# EAGLE board cansat (EAGLE 9.6.2)
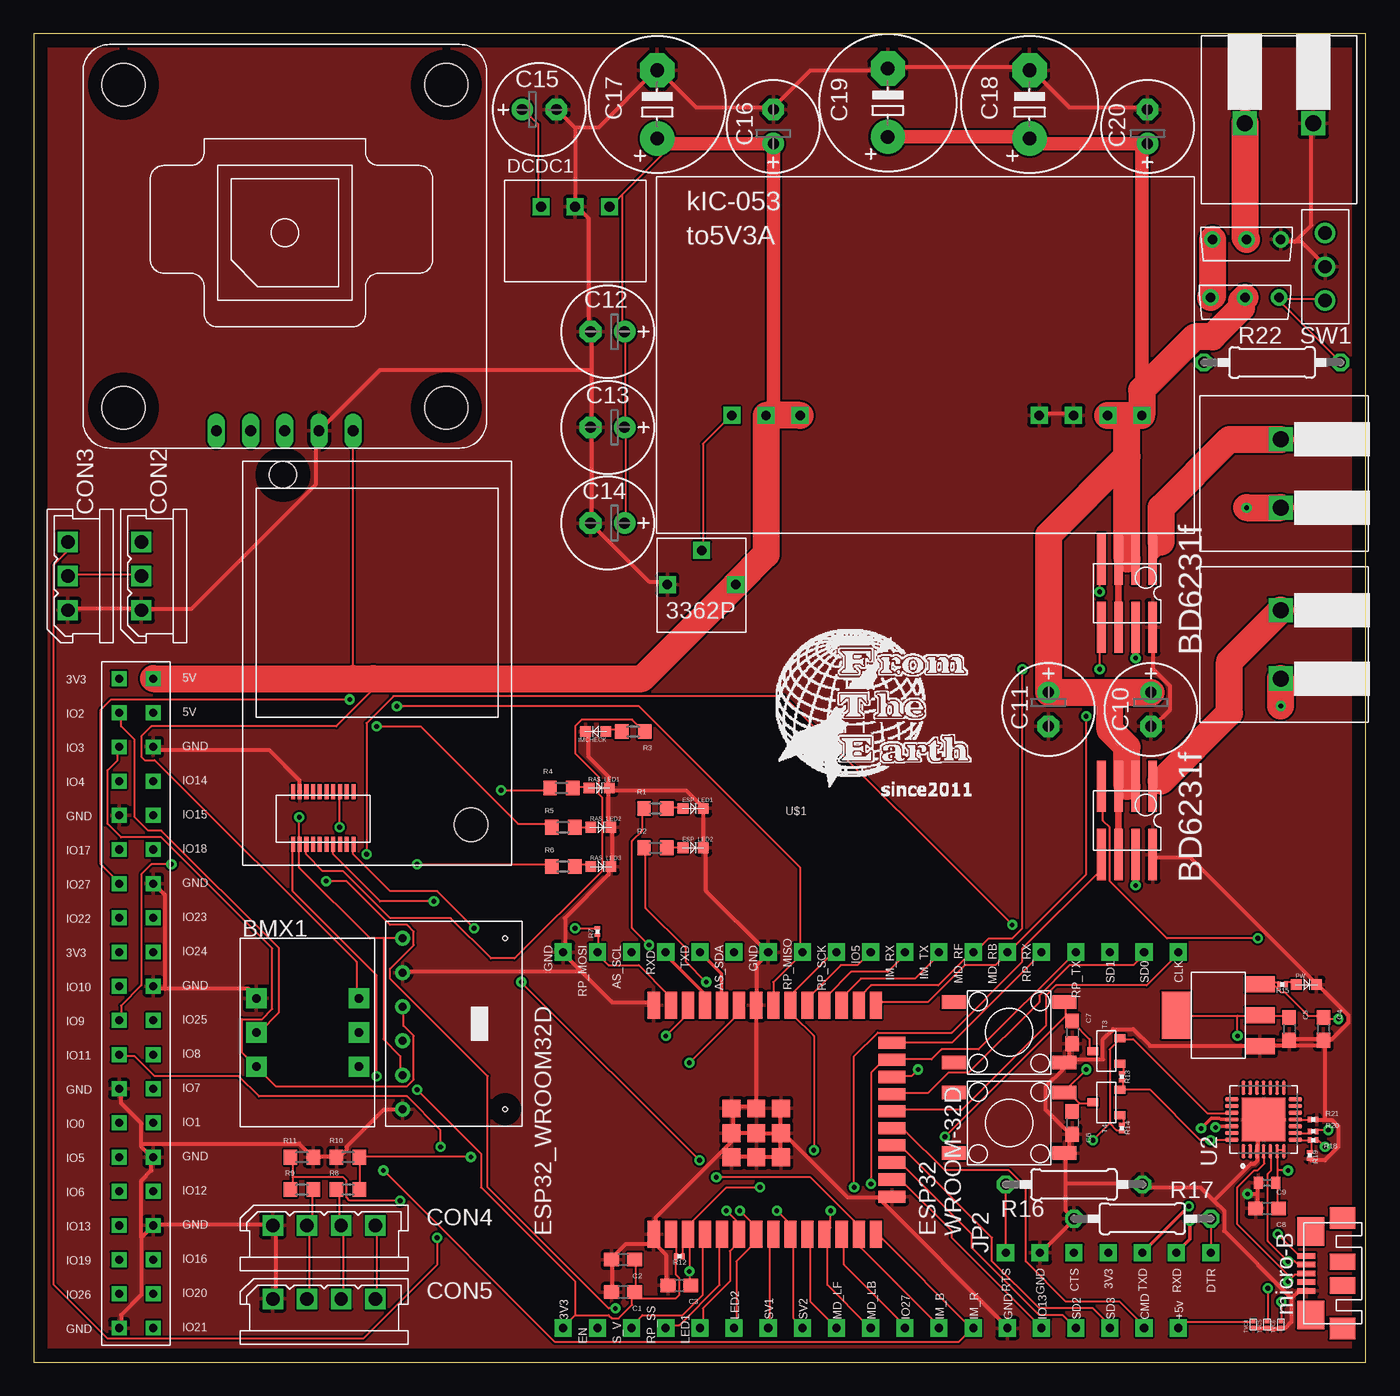
[diagram p0: board, top side]
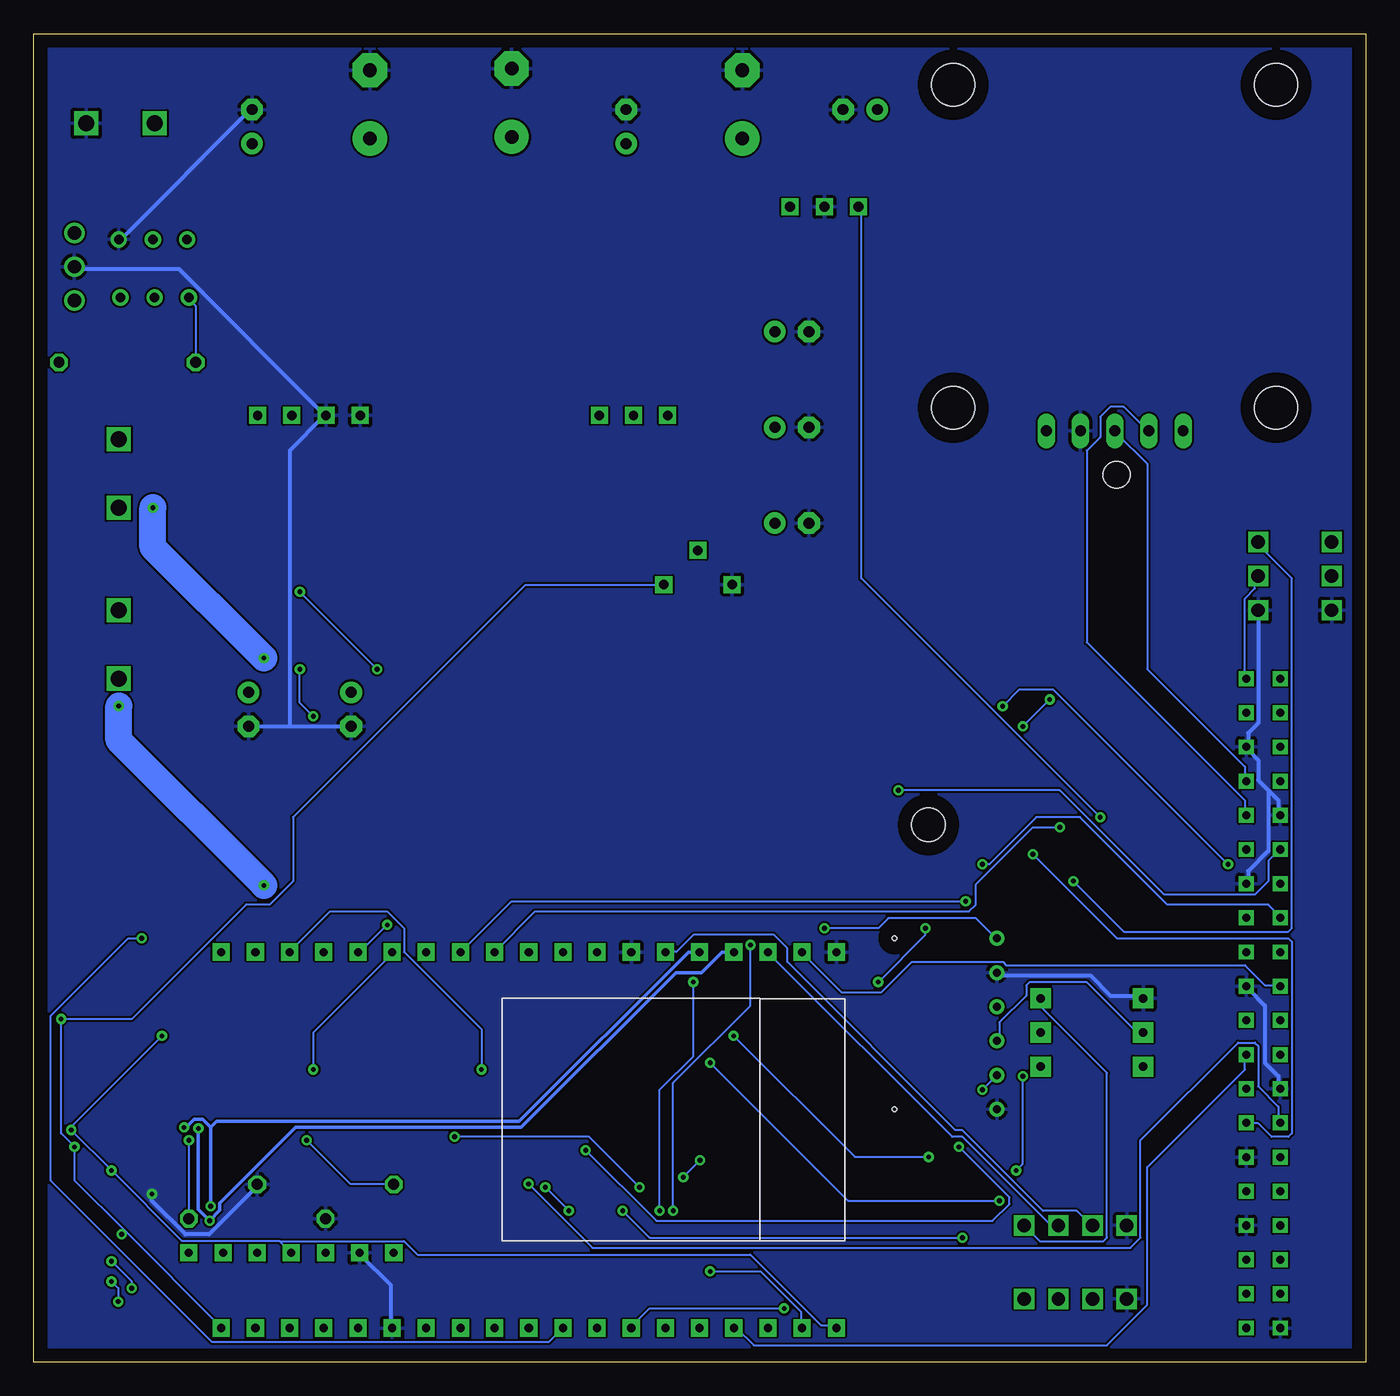
[diagram p1: board, bottom side, seen from below]

Size 99.04 x 98.73 mm. Coordinates in mm from the lower left corner, seen from the top.
Outline: 0,0 99.04,0 99.04,98.73 0,98.73 0,0
Copper layers (1*16): Top 0.035mm / dielectric 1.5mm / Bottom 0.035mm
Design rules "default": minimum track width 6mil, minimum drill 0.35mm, track to track 6mil, track to pad 6mil, pad to pad 6mil, via to via 6mil, smd to smd 6mil, copper to edge 40mil, drill to drill 6mil, minimum pad ring 10mil, minimum via ring 8mil, stop-mask expansion 4mil, vias tented up to drill 0mil, thermal gap 10mil
Net classes: 1 esp: width 0.254 mm, drill 0.127 mm, clearance 0.025 mm; 2 GND_+12V: width 0.305 mm

## Footprints (pad centres in the part's own frame; a part is rotated, then mirrored left to right if it is on the bottom)
AZ1117CH-3.3TRG1 = smd 1.2 x 2.2: 1 -2.3,-6.2; 2 0,-6.2; 3 2.3,-6.2 | smd 3.5 x 2.2: VOUT 0,0
3362P = drill 0.7 pad 1.27 square: CCW -2.54,2.54; CW 2.54,2.54; WIPER 0,0
BMX055 = drill 0.65 pad 1.5 square: 3V3 8.81,-9.53; GND 1.19,-4.46; SCL 1.19,-9.53; SDA 1.19,-7; VCC 8.81,-4.46; VCCIO 8.81,-7
C0603 = smd 1.1 x 1: 1 -0.85,0; 2 0.85,0
C0402 = smd 0.7 x 0.9: 1 -0.65,0; 2 0.65,0
E2,5-7 = drill 0.813 pad 1.6: + -1.27,0 | drill 0.813 pad 1.6 octagon: - 1.27,0
E5-10,5 = drill 1.016 pad 2.54: + -2.54,0 | drill 1.016 pad 2.54 octagon: - 2.54,0
2.5_MINI-SPOX_3PIN = drill 1 square: 1 -1.27,0; 2 1.27,0; 3 3.81,0
2.5_MINI-SPOX_4PIN = drill 1 square: P$1 -1.27,0; P$2 6.35,0; P$3 1.27,0; P$4 3.81,0
3.3V0.5A_M78AR05-0.5 = drill 0.75 pad 1.27 square: GND 0,0; VIN 2.54,0; VOUT -2.54,0
TS-06104 = smd 1 x 1.8: A -2.25,4.1; B -2.25,-4.1; C 2.25,4.1; D 2.25,-4.1
ESP32-WROOM-32D = smd 2 x 0.9: 1_GND -7.5,7.62; 2_3V3 -7.5,6.35; 3_EN -7.5,5.08; 4_SENSOR_VP -7.5,3.81; 5_SENSOR_VN -7.5,2.54; 6_IO34 -7.5,1.27; 7_IO35 -7.5,0; 8_IO32 -7.5,-1.27; 9_IO33 -7.5,-2.54; 10_IO25 -7.5,-3.81; 11_IO26 -7.5,-5.08; 12_IO27 -7.5,-6.35; 13_IO14 -7.5,-7.62; 14_IO12 -7.5,-8.89; 25_IO0 9.5,-8.89; 26_IO4 9.5,-7.62; 27_IO16 9.5,-6.35; 28_IO17 9.5,-5.08; 29_IO5 9.5,-3.81; 30_IO18 9.5,-2.54; 31_IO19 9.5,-1.27; 32_NC 9.5,0; 33_IO21 9.5,1.27; 34_RXD0 9.5,2.54; 35_TXD0 9.5,3.81; 36_IO22 9.5,5.08; 37_IO23 9.5,6.35; 38_GND 9.5,7.62 | smd 0.9 x 2: 15_GND -4.715,-10.1; 16_IO13 -3.445,-10.1; 17_SD2 -2.175,-10.1; 18_SD3 -0.905,-10.1; 19_CMD 0.365,-10.1; 20_CLK 1.635,-10.1; 21_SD0 2.905,-10.1; 22_SD1 4.175,-10.1; 23_IO15 5.445,-10.1; 24_IO2 6.715,-10.1 | smd 1.33 x 1.33: GND@1 -1.8,1.835; GND@2 0,1.835; GND@3 1.835,1.835; GND@4 -1.8,0; GND@5 0,0; GND@6 1.835,0; GND@7 -1.8,-1.835; GND@8 0,-1.835; GND@9 1.835,-1.835
OSXX1608C1A = smd 0.8 x 0.8: AN -0.75,0; CT 0.75,0
AE-GYSFDMAXB = drill 0.8 long: P1 13.716,5.08; P2 13.716,2.54; P3 13.716,0; P4 13.716,-2.54; P5 13.716,-5.08 | hole 3.2: -12,12; 12,12; 12,-12; -12,-12
IM920C = smd 0.3 x 1.1: $P1 -1.75,-13.45; $P2 -1.75,-9.55; $P3 -2.25,-13.45; $P4 -2.25,-9.55; $P5 -2.75,-13.45; $P6 -2.75,-9.55; $P7 -3.25,-13.45; $P8 -3.25,-9.55; $P9 -3.75,-13.45; $P10 -3.75,-9.55; $P11 -4.25,-13.45; $P12 -4.25,-9.55; $P13 -4.75,-13.45; $P14 -4.75,-9.55; $P15 -5.25,-13.45; $P16 -5.25,-9.55; $P17 -5.75,-13.45; $P18 -5.75,-9.55; $P19 -6.25,-13.45; $P20 -6.25,-9.55 | hole 2.5: 7,-12 | hole 2: -7,14
7_2.54 = drill 0.6 pad 1.27 square: P$1 0,7.62; P$2 0,5.08; P$3 0,2.54; P$4 0,0; P$5 0,-2.54; P$6 0,-5.08; P$7 0,-7.62
BD6231F = smd 3.81 x 0.635: FIN -2.54,-1.905; GND 2.54,1.905; OUT1 -2.54,1.905; OUT2 2.54,0.635; RIN 2.54,-1.905; VCC1 -2.54,0.635; VCC2 -2.54,-0.635; VREF 2.54,-0.635
19_2.54 = drill 0.6 pad 1.27 square: P$1 0,12.7; P$2 0,10.16; P$3 0,7.62; P$4 0,5.08; P$5 0,2.54; P$6 0,0; P$7 0,-2.54; P$8 0,-5.08; P$9 0,-7.62; P$10 0,-10.16; P$11 0,-12.7; P$12 0,-15.24; P$13 0,-17.78; P$14 0,-20.32; P$15 0,-22.86; P$16 0,-25.4; P$17 0,-27.94; P$18 0,-30.48; P$19 0,-33.02
R0603 = smd 1 x 1.1: 1 -0.85,0; 2 0.85,0
R0201 = smd 0.28 x 0.43: 1 -0.255,0; 2 0.255,0
0207/10 = drill 0.813 octagon: 1 -5.08,0; 2 5.08,0
RASPBERRYPI4B = drill 0.6 square: 3V3_1 -2.54,-2.54; 3V3_2 -2.54,-22.86; 5V_1 0,-2.54; 5V_2 0,-5.08; GND_1 0,-7.62; GND_2 0,-17.78; GND_3 0,-25.4; GND_4 0,-38.1; GND_5 0,-43.18; GND_6 -2.54,-12.7; GND_7 -2.54,-33.02; GND_8 -2.54,-50.8; GPIO0 -2.54,-35.56; GPIO1 0,-35.56; GPIO2 -2.54,-5.08; GPIO3 -2.54,-7.62; GPIO4 -2.54,-10.16; GPIO5 -2.54,-38.1; GPIO6 -2.54,-40.64; GPIO7 0,-33.02; GPIO8 0,-30.48; GPIO9 -2.54,-27.94; GPIO10 -2.54,-25.4; GPIO11 -2.54,-30.48; GPIO12 0,-40.64; GPIO13 -2.54,-43.18; GPIO14 0,-10.16; GPIO15 0,-12.7; GPIO16 0,-45.72; GPIO17 -2.54,-15.24; GPIO18 0,-15.24; GPIO19 -2.54,-45.72; GPIO20 0,-48.26; GPIO21 0,-50.8; GPIO22 -2.54,-20.32; GPIO23 0,-20.32; GPIO24 0,-22.86; GPIO25 0,-27.94; GPIO26 -2.54,-48.26; GPIO27 -2.54,-17.78
SRIDE_SWITCH = drill 1: L -2.5,0; LR 0,0; R 2.5,0
NPN_SS8050-G = smd 0.6 x 0.8: 1 -0.95,-2.02; 2 0.95,-2.02; 3 0,0
TERMINAL_SLOPED_2PIN = drill 1.2 square: 1 -2.54,0; 2 2.54,0
ESD5484FCT5G = smd 0.28 x 0.3: 1_CT -0.235,0; 2_AN 0.235,0
QFN50P500X500X80-29N = smd 1.01 x 0.27: 1 -2.36,1.5; 2 -2.36,1; 3 -2.36,0.5; 4 -2.36,0; 5 -2.36,-0.5; 6 -2.36,-1; 7 -2.36,-1.5; 15 2.36,-1.5; 16 2.36,-1; 17 2.36,-0.5; 18 2.36,0; 19 2.36,0.5; 20 2.36,1; 21 2.36,1.5 | smd 0.27 x 1.01: 8 -1.5,-2.36; 9 -1,-2.36; 10 -0.5,-2.36; 11 0,-2.36; 12 0.5,-2.36; 13 1,-2.36; 14 1.5,-2.36; 22 1.5,2.36; 23 1,2.36; 24 0.5,2.36; 25 0,2.36; 26 -0.5,2.36; 27 -1,2.36; 28 -1.5,2.36 | smd 3.25 x 3.25: 29 0,0
2SJ681 = drill 0.7: DRAIN 0,0; GATE 2.54,0; SOURCE -2.54,0
5V3A_KIC-053 = drill 0.7 pad 1.27 square: GND1 11.01,0; GND2 8.47,0; VADJ -14.39,0; VIN1 16.09,0; VIN2 13.55,0; VOUT1 -9.31,0; VOUT2 -11.85,0
GY-BMP280-FOOTPRINT = drill 0.6: CSB 11.43,0; GND 3.81,0; SCK 6.35,0; SDI 8.89,0; SDO 13.97,0; VCC 1.27,0 | hole 0.35: 1.27,7.62; 13.97,7.62
MICRO-B_ZX62R-B-5P = smd 0.4 x 1.35: 1 1.3,0; 2 0.65,0; 3 0,0; 4 -0.65,0; 5 -1.3,0 | smd 2.1 x 2: P$6 3.1,-0.325; P$7 -3.1,-0.325 | smd 1.6 x 1.9: P$8 -4.1,-2.675; P$9 4.1,-2.675 | smd 1.2 x 1.9: P$10 0.85,-2.675; P$11 -0.9,-2.675

## Placement (x,y rotation side)
3-REG2  [AZ1117CH-3.3TRG1]  84.96,25.78 90 top
100KR1  100kR  [3362P]  49.66,60.33 180 top
BMX1  BMX055  [BMX055]  15.37,31.5 0 top
C1  22uF  [C0603]  43.81,5.21 180 top
C2  0.1uF  [C0603]  43.81,7.62 180 top
C3  0.1uF  [C0603]  48.01,5.71 180 top
C4  22uf  [C0603]  95.89,24.77 270 top
C5  22uf  [C0603]  93.34,24.77 270 top
C6  0.1uF  [C0603]  77.22,17.78 270 top
C7  0.1uF  [C0603]  77.22,24.51 270 top
C8  0.1uF  [C0603]  91.69,11.43 180 top
C9  4.7uF  [C0402]  91.69,13.34 180 top
C10  100uf  [E2,5-7]  83.06,48.51 270 top
C11  0.1uf  [E2,5-7]  75.44,48.51 270 top
C12  4.7uF  [E2,5-7]  42.67,76.58 180 top
C13  4.7uF  [E2,5-7]  42.67,69.47 180 top
C14  4.7uF  [E2,5-7]  42.67,62.36 180 top
C15  4.7uF  [E2,5-7]  37.59,93.09 0 top
C16  0.1uF  [E2,5-7]  54.99,91.82 90 top
C17  1000uF  [E5-10,5]  46.35,93.47 90 top
C18  1000uF  [E5-10,5]  74.04,93.47 90 top
C19  1000uF  [E5-10,5]  63.5,93.6 90 top
C20  0.1uF  [E2,5-7]  82.8,91.82 90 top
CON2  [2.5_MINI-SPOX_3PIN]  8,57.15 90 top
CON3  [2.5_MINI-SPOX_3PIN]  2.54,57.15 90 top
CON4  [2.5_MINI-SPOX_4PIN]  19.05,10.16 0 top
CON5  [2.5_MINI-SPOX_4PIN]  19.05,4.7 0 top
DCDC1  5-3.3  [3.3V0.5A_M78AR05-0.5]  40.26,85.85 0 top
EN1  TS-06104  [TS-06104]  72.52,24.51 90 top
ESP32_WROOM32D  ESP32-WROOM-32D  [ESP32-WROOM-32D]  53.72,17.02 90 top
ESP_LED1  OSXX1608C1A  [OSXX1608C1A]  49.02,41.15 0 top
ESP_LED2  OSXX1608C1A  [OSXX1608C1A]  49.02,38.23 0 top
GPS  AE-GYSFDMAXB  [AE-GYSFDMAXB]  18.67,82.93 270 top
IM  IM920C  [IM920C]  25.53,51.94 0 top
IMCHECK  OSXX1608C1A  [OSXX1608C1A]  41.78,46.86 180 top
IO1  TS-06104  [TS-06104]  72.52,17.78 90 top
JP2  7pin  [7_2.54]  79.88,8.13 90 top
MD_L  [BD6231F]  81.28,40.26 270 top
MD_R  [BD6231F]  81.28,57.15 270 top
PIN_L  19_2.54  [19_2.54]  52.07,2.54 90 top
PIN_R  19_2.54  [19_2.54]  52.07,30.48 90 top
PW  OSXX1608C1A  [OSXX1608C1A]  94.61,28.07 0 top
R1  1.5k  [R0603]  46.23,41.15 0 top
R2  1.5k  [R0603]  46.23,38.23 0 top
R3  1.5k  [R0603]  44.58,46.86 180 top
R4  1.5k  [R0603]  39.24,42.67 0 top
R5  1.5k  [R0603]  39.37,39.75 0 top
R6  1.5k  [R0603]  39.37,36.83 0 top
R7  10k  [R0201]  41.91,32 90 top
R8  2.2kR  [R0603]  23.37,12.83 180 top
R9  2.2kR  [R0603]  19.94,12.83 0 top
R10  3.3kR  [R0603]  23.37,15.24 0 top
R11  3.3kR  [R0603]  19.94,15.24 180 top
R12  10k  [R0201]  48.01,7.87 180 top
R13  10k  [R0201]  80.9,21.21 90 top
R14  10k  [R0201]  80.9,17.4 90 top
R15  2k  [R0201]  92.84,28.07 180 top
R16  100k  [0207/10]  77.34,13.21 180 top
R17  100k  [0207/10]  82.42,10.67 0 top
R18  22k  [R0201]  95.12,16.51 180 top
R19  47k  [R0201]  94.87,15.37 90 top
R20  2k  [R0201]  95.12,17.14 180 top
R21  10k  [R0201]  95.12,18.03 0 top
R22  [0207/10]  92.08,74.3 180 top
RAS_LED1  OSXX1608C1A  [OSXX1608C1A]  42.04,42.67 0 top
RAS_LED2  OSXX1608C1A  [OSXX1608C1A]  42.16,39.75 0 top
RAS_LED3  OSXX1608C1A  [OSXX1608C1A]  42.16,36.83 0 top
RASPBERRYPI_4B  [RASPBERRYPI4B]  8.89,53.34 0 top
SW1  [SRIDE_SWITCH]  96.01,81.41 90 top
T3  [NPN_SS8050-G]  78.74,23.11 90 top
T4  [NPN_SS8050-G]  78.74,19.3 90 top
TM1  [TERMINAL_SLOPED_2PIN]  92.71,66.04 270 top
TM2  [TERMINAL_SLOPED_2PIN]  92.71,53.34 270 top
TM3  [TERMINAL_SLOPED_2PIN]  92.58,92.08 0 top
TVC4  [ESD5484FCT5G]  90.68,2.79 90 top
TVC5  [ESD5484FCT5G]  91.69,2.79 90 top
TVC6  [ESD5484FCT5G]  92.71,2.79 90 top
U2  CP2102N-A01-GQFN28  [QFN50P500X500X80-29N]  91.44,18.03 90 top
U$1  [LOGO]  54.61,40.64 0 top
U$7  2SJ681-PCH  [2SJ681]  90.17,83.44 0 top
U$8  5V3A_KIC-053  [5V3A_KIC-053]  66.29,70.36 0 top
U$9  GY-BPM280  [GY-BMP280-FOOTPRINT]  27.43,32.77 270 top
U$10  2SJ681-PCH  [2SJ681]  90.04,79.12 0 top
USB2  [MICRO-B_ZX62R-B-5P]  94.61,6.6 90 top

## Library data of the parts
3-REG2 = Chip 3-Terminal Regulator
100KR1 = TRIM_register
BMX1 = BMX055
C1-C20 = rcl; SPICEPREFIX: C
CON2-CON5 = Connector
DCDC1 U$8 = DC-DC
EN1 IO1 SW1 = Switches
ESP32_WROOM32D = ESP32
ESP_LED1 ESP_LED2 IMCHECK PW RAS_LED1-RAS_LED3 = ChipLED
GPS = AE-GYSFDMAXB
IM = IM920
JP2 PIN_L PIN_R = JumperPins
MD_L MD_R = Motor Driver
R1-R22 = rcl; SPICEPREFIX: R
RASPBERRYPI_4B = RASPBERRYPI4B
T3 T4 = ChipTransister
TM1-TM3 = TerminalBrock
TVC4-TVC6 = TVC Diode
U2 = CP2102N-A01-GQFN28; AVAILABILITY: In Stock; DESCRIPTION: USB Bridge, USB to UART USB 2.0 UART Interface 28-QFN (5x5); MF: Silicon Labs; MP: CP2102N-A01-GQFN28; PACKAGE: QFN-28 Silicon Labs; PRICE: None; PURCHASE-URL: https://pricing.snapeda.com/search/part/CP2102N-A01-GQFN28/?ref=eda
U$1 = logo
U$7 U$10 = mosfet
U$9 = BMP280
USB2 = USB

## Nets
3V3: BMX1.3V3
+3V3: 3-REG2.2 3-REG2.VOUT C1.1 C2.1 C5.1 C8.1 C9.1 C15.+ DCDC1.VOUT ESP32_WROOM32D.2_3V3 IM.$P17 JP2.P$4 PIN_L.P$1 R7.2 R12.2 R20.1 U2.6 U2.7 U$9.CSB U$9.VCC
+5V: 3-REG2.3 100KR1.CCW BMX1.VCC C4.1 C12.+ C13.+ C14.+ C16.+ C17.+ CON2.2 CON3.2 CON4.P$2 CON5.P$2 DCDC1.VIN GPS.P1 PIN_L.P$19 R15.2 R18.1 RASPBERRYPI_4B.5V_1 TVC4.2_AN U$8.VOUT1 U$8.VOUT2 USB2.1
+12V: C10.+ C11.+ C18.+ C19.+ C20.+ MD_L.VCC1 MD_L.VCC2 MD_L.VREF MD_R.VCC1 MD_R.VCC2 MD_R.VREF U$8.VIN1 U$8.VIN2 U$10.DRAIN
+D: TVC6.2_AN U2.4 USB2.3
-D: TVC5.2_AN U2.5 USB2.2
A7_1: R22.2 U$7.SOURCE U$10.SOURCE
AS_SCL: CON4.P$4 CON5.P$4 PIN_R.P$3 R8.2
AS_SDA: CON4.P$3 CON5.P$3 PIN_R.P$6 R9.2
BB_SCL: BMX1.SCL RASPBERRYPI_4B.GPIO3 U$9.SCK
BB_SDA: BMX1.SDA RASPBERRYPI_4B.GPIO2 U$9.SDI
CLK: ESP32_WROOM32D.20_CLK PIN_R.P$19
CMD: ESP32_WROOM32D.19_CMD PIN_L.P$18
CPVBUS: R18.2 R19.2 U2.8
DTR: JP2.P$7 R13.1 R17.2 T4.2 U2.28
EN: C3.1 C7.1 EN1.D ESP32_WROOM32D.3_EN PIN_L.P$2 R12.1 T3.3
GND [GND_+12V]: 3-REG2.1 100KR1.CW BMX1.GND C1.2 C2.2 C3.2 C4.2 C5.2 C6.2 C7.2 C8.2 C9.2 C10.- C11.- C12.- C13.- C14.- C15.- C16.- C17.- C18.- C19.- C20.- CON2.1 CON3.1 CON4.P$1 CON5.P$1 DCDC1.GND EN1.B ESP32_WROOM32D.1_GND ESP32_WROOM32D.15_GND ESP32_WROOM32D.32_NC ESP32_WROOM32D.38_GND ESP32_WROOM32D.GND@1 ESP32_WROOM32D.GND@2 ESP32_WROOM32D.GND@3 ESP32_WROOM32D.GND@4 ESP32_WROOM32D.GND@5 ESP32_WROOM32D.GND@6 ESP32_WROOM32D.GND@7 ESP32_WROOM32D.GND@8 ESP32_WROOM32D.GND@9 ESP_LED1.CT ESP_LED2.CT GPS.P2 IM.$P18 IMCHECK.CT IO1.B JP2.P$2 MD_L.GND MD_R.GND PIN_L.P$14 PIN_R.P$1 PIN_R.P$7 PW.CT R10.1 R11.1 R16.1 R17.1 R19.1 R21.2 RAS_LED1.CT RAS_LED2.CT RAS_LED3.CT RASPBERRYPI_4B.GND_1 RASPBERRYPI_4B.GND_2 RASPBERRYPI_4B.GND_3 RASPBERRYPI_4B.GND_4 RASPBERRYPI_4B.GND_5 RASPBERRYPI_4B.GND_6 RASPBERRYPI_4B.GND_7 RASPBERRYPI_4B.GND_8 SW1.LR TM3.2 TVC4.1_CT TVC5.1_CT TVC6.1_CT U2.3 U2.29 U$7.GATE U$8.GND1 U$8.GND2 U$9.GND U$9.SDO USB2.5
GPS_RX: GPS.P3 RASPBERRYPI_4B.GPIO14
GPS_TX: GPS.P4 RASPBERRYPI_4B.GPIO15
IM_BUSY: ESP32_WROOM32D.13_IO14 IM.$P1 PIN_L.P$12
IM_RESET: ESP32_WROOM32D.14_IO12 IM.$P19 PIN_L.P$13
IM_RX: ESP32_WROOM32D.28_IO17 IM.$P6 PIN_R.P$11
IM_TX: ESP32_WROOM32D.27_IO16 IM.$P7 PIN_R.P$12
IO5: ESP32_WROOM32D.29_IO5 PIN_R.P$10
IO13: ESP32_WROOM32D.16_IO13 PIN_L.P$15
IO27: ESP32_WROOM32D.12_IO27 PIN_L.P$11
LED1: ESP32_WROOM32D.6_IO34 PIN_L.P$5 R1.1
LED2: ESP32_WROOM32D.7_IO35 PIN_L.P$6 R2.1
LED3: IM.$P15 R3.1
LED4: R4.1 RASPBERRYPI_4B.GPIO17
LED5: R5.1 RASPBERRYPI_4B.GPIO27
LED6: R6.1 RASPBERRYPI_4B.GPIO22
MD_LB: ESP32_WROOM32D.11_IO26 MD_L.RIN PIN_L.P$10
MD_LF: ESP32_WROOM32D.10_IO25 MD_L.FIN PIN_L.P$9
MD_RB: C6.1 ESP32_WROOM32D.25_IO0 IO1.D MD_R.RIN PIN_R.P$14 T4.3
MD_RF: ESP32_WROOM32D.26_IO4 MD_R.FIN PIN_R.P$13
N$1: ESP_LED1.AN R1.2
N$2: ESP_LED2.AN R2.2
N$3: IMCHECK.AN R3.2
N$4: R4.2 RAS_LED1.AN
N$5: R5.2 RAS_LED2.AN
N$6: R6.2 RAS_LED3.AN
N$7: ESP32_WROOM32D.36_IO22 R8.1 R10.2
N$8: ESP32_WROOM32D.33_IO21 R9.1 R11.2
N$9: TM3.1 U$7.DRAIN
N$13: PW.AN R15.1
N$14: R13.2 T3.1
N$15: R14.2 T4.1
N$16: R20.2 U2.9
N$17: R21.1 U2.11
N$18: 100KR1.WIPER U$8.VADJ
N$20: R22.1 SW1.L U$10.GATE
OUT_MD_L1 [GND_+12V]: MD_L.OUT1 TM2.1
OUT_MD_L2 [GND_+12V]: MD_L.OUT2 TM2.2
OUT_MD_R1 [GND_+12V]: MD_R.OUT1 TM1.1
OUT_MD_R2 [GND_+12V]: MD_R.OUT2 TM1.2
RP_MISO: ESP32_WROOM32D.31_IO19 PIN_R.P$8 RASPBERRYPI_4B.GPIO9
RP_MOSI: ESP32_WROOM32D.37_IO23 PIN_R.P$2 R7.1 RASPBERRYPI_4B.GPIO10
RP_RX: ESP32_WROOM32D.24_IO2 PIN_R.P$15 RASPBERRYPI_4B.GPIO1
RP_SCK: ESP32_WROOM32D.30_IO18 PIN_R.P$9 RASPBERRYPI_4B.GPIO11
RP_SS: ESP32_WROOM32D.5_SENSOR_VN PIN_L.P$4 RASPBERRYPI_4B.GPIO8
RP_TX: ESP32_WROOM32D.23_IO15 PIN_R.P$16 RASPBERRYPI_4B.GPIO0
RTS: JP2.P$1 R14.1 R16.2 T3.2 U2.24
RXD [esp]: ESP32_WROOM32D.35_TXD0 JP2.P$6 PIN_R.P$4 U2.25
SD0: ESP32_WROOM32D.21_SD0 PIN_R.P$18
SD1: ESP32_WROOM32D.22_SD1 PIN_R.P$17
SD2: ESP32_WROOM32D.17_SD2 PIN_L.P$16
SD3: ESP32_WROOM32D.18_SD3 PIN_L.P$17
SENSOR_VP: ESP32_WROOM32D.4_SENSOR_VP PIN_L.P$3
SERVO1: CON2.3 ESP32_WROOM32D.8_IO32 PIN_L.P$7
SERVO2: CON3.3 ESP32_WROOM32D.9_IO33 PIN_L.P$8
TXD [esp]: ESP32_WROOM32D.34_RXD0 JP2.P$5 PIN_R.P$5 U2.26
VCCIO: BMX1.VCCIO

## Tracks (layer width: path | path; a pad name or v marks a point on that pad's centre or on a via)
+3V3  (via drill 0.35)
  Top 0.152: ESP32_WROOM32D.2_3V3 47.5,9.5 47.75,9.25 47.75,8 R12.2 47.75,7.75 47.75,6.5 48,6.25 48,5 47.75,4.75 44.5,4.75 | C1.1 44.75,5.25 44.75,7.5 C2.1 | 44.5,4.75 44.5,4.25 43.5,3.25 43,3.25 42.75,3.5 40.25,3.5 | 44.5,4.75 44.5,5 C1.1 | 40.25,3.5 39.5,2.75 PIN_L.P$1 | 44.5,4.75 C1.1 | C5.1 93.25,25.75 91.25,25.75 3-REG2.2 91,25.75 89.5,25.75 | 89.5,25.75 85,25.75 3-REG2.VOUT | U2.7 93,15.75 92.5,15.75 U2.6 92.5,15.5 92.5,14.25 | C8.1 92.5,11.5 92.5,13.25 C9.1 92.5,13.5 92.5,14.25 | v96.25,17.25 95.5,17.25 R20.1 | v93.25,14.25 92.5,14.25 | v89.5,24.25 89.5,25.75 | DCDC1.VOUT 37.5,86 37.5,92 36.5,93 C15.+ | v40.25,32.25 41.75,32.25 R7.2 | 26,31.5 27.25,31.5 U$9.VCC | 26,31.5 25,31.5 19.75,36.75 19.75,38.25 IM.$P17 19.75,38.5 v19.75,40.5 | 26,31.5 26,24 27.25,22.75 27.25,21.5 U$9.CSB | 40.25,3.5 40.25,6 33.25,13 33.25,15.5 v28.5,20.25
  Bottom 0.152: 80.75,9 88,9 v93.25,14.25 v96.25,17.25 96.25,17.5 v89.5,24.25 | 80.75,9 80,8.25 JP2.P$4 | 80.75,9 71.5,9 70.5,8 45.75,8 40.5,2.75 39.5,2.75 PIN_L.P$1 | v40.25,32.25 36.25,32.25 35.5,33 29,33 27.5,31.5 U$9.VCC | v19.75,40.5 37.5,58.25 37.5,85.75 DCDC1.VOUT | v28.5,20.25 27.5,21.25 U$9.CSB
+5V  (via drill 0.35)
  Top 0.152: 92,28.25 91.25,28.25 3-REG2.3 92,28.25 | 92,28.25 92.5,28.25 R15.2 | 92,28.25 92.75,27.5 93,27.5 94.75,25.75 95.75,25.75 C4.1 96,25.5 v97,25.5 | TVC4.2_AN 90.75,3 85.5,3 85.25,2.75 PIN_L.P$19 | v96,16 95.5,16.5 R18.1 | v92.5,9.5 94,8 94.5,8 USB2.1 | CON5.P$2 25.5,4.75 25.5,10 CON4.P$2 | C14.+ 44,62.5 44,69.25 C13.+ 44,69.5 44,76.5 C12.+ 43.75,76.75 43.75,86.75 | CON3.2 2.75,58.5 8,58.5 CON2.2 | 43.75,86.75 47.25,90.25 C17.+ | 43.75,86.75 43,86 DCDC1.VIN | 23.75,50.8 23.75,69 GPS.P1 | BMX1.VCC 24,27.25 24,29.75 9,44.75 8.25,44.75 8,45 8,46.5 8.75,47.25 22.5,47.25 25.25,50 25.25,50.8
  Top 1: C17.+ 46.74,90.55 C16.+ 54.99,70.91 U$8.VOUT2
  Top 2: U$8.VOUT1 U$8.VOUT2 54.44,60.03 100KR1.CCW 45.21,50.8 25.25,50.8 23.75,50.8 RASPBERRYPI_4B.5V_1
  Bottom 0.152: 92.25,9.75 85.25,2.75 PIN_L.P$19 | 92.25,9.75 96,13.5 v96,16 97,17 v97,25.5 91.75,25.5 83.25,34 81.5,34 79.75,35.75 79.75,40.5 62.5,57.75 52.25,57.75 100KR1.CCW | 92.25,9.75 v92.5,9.5 | BMX1.VCC 24,27 24,26.25 19.25,21.5 19.25,9.25 19.5,9 24.25,9 25.25,10 CON4.P$2 | CON2.2 8.25,58.25 8.25,57.5 9,56.75 9,51 RASPBERRYPI_4B.5V_1
+12V
  Top 0.5: MD_R.VCC1 81.28,59.69 MD_R.VCC2 MD_R.VREF | MD_L.VCC1 81.28,42.8 MD_L.VCC2 MD_L.VREF
  Top 1: U$8.VIN1 82.38,90.13 C20.+ 74.42,90.55 C18.+ 73.91,91.06 C19.+
  Top 2: U$10.DRAIN 89.78,78.86 89.78,78.36 87.63,76.2 86.34,76.2 82.38,72.25 U$8.VIN1 81.28,70.36 | U$8.VIN2 81.28,70.36 | 80.01,49.78 C11.+ 75.44,61.47 81.28,67.31 | 80.01,49.78 C10.+ | 81.28,59.69 81.28,67.31 | 81.28,67.31 81.28,70.36 | 81.28,42.8 81.28,45.72 80.01,46.99 80.01,49.78
+D  (via drill 0.35)
  Top 0.152: v92.75,4.5 92.75,3 TVC6.2_AN | 93.5,6.25 93.75,6.5 94.5,6.5 USB2.3 | 93.5,6.25 89.5,10.25 89.5,13 90.75,14.25 91,14.25 91.5,14.75 91.5,15.5 U2.4 | 93.5,6.25 v93.25,6
  Bottom 0.152: v92.75,4.5 92.75,5.5 v93.25,6
-D  (via drill 0.35)
  Top 0.152: v91.75,5.5 91.75,3 TVC5.2_AN | USB2.2 94.5,7.25 94,7.25 93.75,7.5 v93.25,7.5 91.75,9 91.75,14 92,14.25 92,15.5 U2.5
  Bottom 0.152: v91.75,5.5 91.75,6 v93.25,7.5
A7_1
  Top 2: U$7.SOURCE 87.63,79.25 U$10.SOURCE
  Bottom 0.152: R22.2 87,74.5 87,78.5 87.5,79 U$10.SOURCE
AS_SCL
  Top 0.152: R8.2 22.75,12.75 22.75,10.25 CON4.P$4 23,10 23,4.75 CON5.P$4
  Bottom 0.152: PIN_R.P$3 44.25,30.25 30.75,16.75 30,16.75 23.5,10.25 23,10.25 CON4.P$4
AS_SDA
  Top 0.152: R9.2 20.75,12.75 20.75,10.5 20.5,10.25 CON4.P$3 20.5,10 20.5,4.75 CON5.P$3
  Bottom 0.152: PIN_R.P$6 52,30.5 51.25,30.5 50,31.75 44,31.75 43,30.75 43,29.75 30.5,17.25 30,17.25 24,11.25 21.5,11.25 20.5,10.25 CON4.P$3
BB_SCL
  Top 0.152: U$9.SCK 27.5,26.25 27.5,25 28.25,24.25 28.25,21 27.75,20.5 18,20.5 16.75,21.75 BMX1.SCL 16.5,22 15.5,23 15.5,25.5 17,25.5 17.75,26.25 17.75,30.75 9.5,39 6.5,39 5.5,40 5.5,44 6.25,44.75 6.25,45.5 RASPBERRYPI_4B.GPIO3
BB_SDA
  Top 0.152: RASPBERRYPI_4B.GPIO2 6.5,48.25 6.5,47.25 7.5,46.25 7.5,40.5 8.5,39.5 9.5,39.5 18.25,30.75 18.25,26 16.75,24.5 BMX1.SDA
  Bottom 0.152: U$9.SDI 27.25,24 27.25,25.25 25.25,27.25 25.25,28 25,28.25 20.75,28.25 16.75,24.25 BMX1.SDA
CLK
  Top 0.152: ESP32_WROOM32D.20_CLK 64,18.75 69,18.75 75.25,25 75.25,27.25 76,28 82.75,28 85,30.25 PIN_R.P$19
CMD
  Top 0.152: ESP32_WROOM32D.19_CMD 64,17.25 64.75,17.25 67.75,14.25 72.5,14.25 73.75,13 73.75,7.5 76.75,4.5 80.75,4.5 82.5,2.75 PIN_L.P$18
CPVBUS
  Top 0.152: R19.2 95,15.75 95,16.5 R18.2 94.75,16.5 94,16.5 U2.8
DTR  (via drill 0.35)
  Top 0.152: JP2.P$7 87.5,8.25 87.5,10.5 R17.2 | R13.1 81,21 81,20.5 T4.2 81,20.25 83,20.25 86.75,16.5 v87.5,16.5 89,16.5 U2.28
  Bottom 0.152: v87.5,16.5 87.5,10.75 R17.2
EN  (via drill 0.35)
  Top 0.152: T3.3 78.5,23.25 78.5,24 77.25,25.25 C7.1 | 76.75,25.75 76.75,26.75 EN1.D | 76.75,25.75 77,25.5 C7.1 | R12.1 48.25,8 48.25,9.25 48.5,9.5 ESP32_WROOM32D.3_EN | C3.1 48.75,5.75 v48.75,6.75 48.75,9.5 ESP32_WROOM32D.3_EN | v67.75,16.75 76.75,25.75 | v54,13 51.5,13 48.75,10.25 48.75,9.75 ESP32_WROOM32D.3_EN | 76.75,25.75 C7.1
  Bottom 0.152: v48.75,6.75 45,6.75 42,3.75 42,2.75 PIN_L.P$2 | v67.75,16.75 57.75,16.75 v54,13
GND  (via drill 0.35)
  Top 0.305: MD_R.GND 83.25,54.5 83.25,51.5 84.5,50.25 84.5,48.5 83.25,47.25 C10.- | U$8.GND2 75,70.5 77.25,70.5 U$8.GND1 | 93.75,83.25 94.25,83.25 96,81.5 SW1.LR | 93.75,83.25 92.75,83.25 U$7.GATE | 93.75,83.25 95,84.5 95,92 TM3.2 | C20.- 82.75,93.25 77,93.25 74.25,96 C18.- 74,96.25 63.5,96.25 C19.- 63.5,96 57.75,96 55,93.25 C16.- 54.75,93.25 49.25,93.25 46.5,96 C17.- 46.25,96 42,91.75 40.25,91.75 | 100KR1.CW 47,58 45.75,58 41.5,62.25 C14.- 41.5,62.5 41.5,69.25 C13.- 41.5,69.5 41.5,73.75 | 41.5,73.75 41.5,76.5 C12.- 41.25,76.75 41.25,85 40.5,85.75 DCDC1.GND 40.25,86 40.25,91.75 | 40.25,91.75 39,93 C15.- | U$9.SDO 27.25,18.75 26,18.75 23.25,16 23.25,15.75 22.75,15.25 R10.1 22.5,15.25 21,15.25 R11.1 20.75,15.25 19.75,16.25 8,16.25 | CON5.P$1 18,4.75 18,10 CON4.P$1 17.75,10.25 9,10.25 RASPBERRYPI_4B.GND_5 8.75,10 8,9.25 | 8,16.25 8,16 8.75,15.25 RASPBERRYPI_4B.GND_4 8.75,15 8.75,14.25 8,13.5 8,9.25 | 8,16.25 8,17.75 6.5,19.25 6.5,20.25 RASPBERRYPI_4B.GND_7 | 8,9.25 8,5 6.5,3.5 6.5,2.75 RASPBERRYPI_4B.GND_8 | 9.75,27.75 16,27.75 16.5,27.25 BMX1.GND | 9.75,27.75 9,27.75 RASPBERRYPI_4B.GND_3 | IM.$P18 19.75,42.5 19.75,43.25 17.5,45.5 9,45.5 RASPBERRYPI_4B.GND_1 | 9.75,27.75 9.75,34.75 9,35.5 RASPBERRYPI_4B.GND_2 | CON3.1 2.75,56 8,56 CON2.1 8.25,56 11.75,56 21,65.25 21,69 GPS.P2 21.25,69.25 25.75,73.75 41.5,73.75 | 96,18 95.5,18 R21.2 | 96,18 96.5,18 97,17.5 97,16 96,15 95,15 R19.1 | C4.2 96,24 96.5,24 97.75,25.25 97.75,25.75 95.5,28 PW.CT 95.25,28.25 86,37.5 83.25,37.5 MD_L.GND | C5.2 93.5,24 95.75,24 C4.2 | 96,23.5 96,23.75 C4.2 | 96,23.5 96,18 | 96,23.5 91.25,23.5 3-REG2.1 91,23.5 83,23.5 81.75,24.75 80.25,24.75 79.5,24 79.5,22.5 76.75,22.5
  Top 0.305: 96,23.5 C4.2 | 76.75,22.5 77,22.75 77,23.5 C7.2 | 76.75,13.25 76.75,11.25 77.25,10.75 R17.1 77.25,10.5 75,8.25 JP2.P$2 | 76.75,13.25 76.75,15.5 IO1.B 76.75,15.75 77,16 77,16.75 C6.2 77,17 75.25,18.75 75.25,20.5 76.5,21.75 76.5,22.25 EN1.B 76.75,22.5 | U2.29 91.25,18 91,17.75 91,15.75 U2.3 91,15.5 91,15 90.75,14.75 90.5,14.75 87.75,12 | 91.75,2.5 90.75,2.5 TVC4.1_CT | 91.75,2.5 92.75,2.5 | 91.75,2.5 TVC5.1_CT | 92.75,2.5 93,2.5 93.5,3 93.5,4.75 | 93.5,4.75 94,5.25 94.5,5.25 USB2.5 | 92.75,2.5 TVC6.1_CT | 91,12.5 91,11.5 C8.2 | 91,12.5 91,13.25 C9.2 | v90.25,12.5 91,12.5 | 93.5,4.75 88.5,9.75 88.5,11.25 87.75,12 | 87.75,12 86.75,13 82.5,13 R16.1 82.25,13.25 76.75,13.25 | 40.75,29 39.5,30.25 PIN_R.P$1 39.5,30.5 39.5,33 42.75,36.25 42.75,36.75 RAS_LED3.CT 43,37 43,39.75 RAS_LED2.CT 42.75,40 42.75,42.5 RAS_LED1.CT | 40.75,29 43,26.75 46,26.75 ESP32_WROOM32D.38_GND | 40.75,29 27.5,29 U$9.GND | IMCHECK.CT 41.25,46.75 41.25,45 42.75,43.5 42.75,42.75 RAS_LED1.CT | RAS_LED1.CT 43,42.5 48.5,42.5 49.75,41.25 ESP_LED1.CT 49.75,41 49.75,38.25 ESP_LED2.CT 50,38 50,35 54.5,30.5 PIN_R.P$7 54.5,30.25 53.75,29.5 53.75,26.75 ESP32_WROOM32D.32_NC 53.75,26.5 53.75,19 ESP32_WROOM32D.GND@6 53.5,19 52,19 ESP32_WROOM32D.GND@3 52,18.75 52,17.25 ESP32_WROOM32D.GND@2 | C1.2 43,5.25 43,7.5 C2.2 43,7.75 44,8.75 46.25,8.75 | 46.25,8.75 47,8 47,5.75 C3.2 | 46.25,8.75 46.25,9.5 ESP32_WROOM32D.1_GND | 46.25,8.75 ESP32_WROOM32D.1_GND | ESP32_WROOM32D.GND@1 52,15.25 53.5,15.25 ESP32_WROOM32D.GND@4 53.75,15.25 55.5,15.25 | ESP32_WROOM32D.GND@8 55.5,17.25 55.5,18.75 ESP32_WROOM32D.GND@9 | 52.5,17 53.5,17 ESP32_WROOM32D.GND@5 53.75,17 55.5,17
  Top 0.305: 52.5,17 52,17 ESP32_WROOM32D.GND@2 | 62.75,12.25 60.5,12.25 55.75,17 ESP32_WROOM32D.GND@8 | 62.75,12.25 63.75,12.25 ESP32_WROOM32D.15_GND | 55.5,17 55.5,15.25 | 55.5,15.25 ESP32_WROOM32D.GND@7 | 55.5,17 ESP32_WROOM32D.GND@8 | 52.5,17 46.25,10.75 46.25,9.75 ESP32_WROOM32D.1_GND | 52.5,17 ESP32_WROOM32D.GND@2 | 62.75,12.25 72.25,2.75 PIN_L.P$14
  Bottom 0.305: 80,47.25 83,47.25 C10.- | 80,47.25 75.5,47.25 C11.- | SW1.LR 96,81.25 88.25,81.25 77.5,70.5 U$8.GND1 77.5,70.25 80,67.75 80,47.25 | U$7.GATE 92.5,83.5 83,93 C20.- | 7.25,42.5 8,43.25 8,44.75 8.75,45.5 RASPBERRYPI_4B.GND_1 8.75,45.75 8.75,46.75 8,47.5 8,55.75 CON2.1 | 7.25,42.5 6.5,41.75 6.5,40.75 RASPBERRYPI_4B.GND_6 | 7.25,42.5 7.25,38 8.75,36.5 8.75,35.75 RASPBERRYPI_4B.GND_2 | RASPBERRYPI_4B.GND_7 6.5,20.5 6.5,21.25 7.5,22.25 7.5,26.5 8.75,27.75 RASPBERRYPI_4B.GND_3 | PIN_L.P$14 72.5,2.75 72.5,5.75 74.75,8 JP2.P$2 | v90.25,12.5 90.25,12 87.75,9.5 86,9.5 82.5,13 R16.1 | BMX1.GND 16.75,27.25 19,27.25 20.5,28.75 27.25,28.75 U$9.GND
  pour Bottom: -1.27,100.33 100.33,100.33 100.33,-1.27 -1.27,-1.27
  pour Top: -1.27,100.33 100.33,100.33 100.33,-1.27 -1.27,-1.27
GPS_RX
  Bottom 0.152: RASPBERRYPI_4B.GPIO14 9,43.25 9,44.25 16.25,51.5 16.25,66.75 18.5,69 GPS.P3
GPS_TX
  Bottom 0.152: RASPBERRYPI_4B.GPIO15 9,40.75 9,41.75 20.75,53.5 20.75,67.75 19.75,68.75 19.75,70.25 19,71 18,71 16.25,69.25 GPS.P4
IM_BUSY  (via drill 0.35)
  Top 0.152: v32.75,32.25 30,35 26.5,35 23.75,37.75 23.75,38.25 IM.$P1 | v49.5,15 v36.25,28.25 | v50.75,13.75 57.75,13.75 61.25,10.25 61.25,9.75 ESP32_WROOM32D.13_IO14 61.5,9.5 61.5,8.5 67.25,2.75 PIN_L.P$12
  Bottom 0.152: v32.75,32.25 32.75,31.75 v36.25,28.25 | v50.75,13.75 v49.5,15
IM_RESET  (via drill 0.35)
  Top 0.152: v25.5,21.25 25.5,28.75 19.25,35 19.25,38.25 IM.$P19 | v26,14.25 38.75,1.5 68.75,1.5 69.75,2.5 | 69.75,2.5 62.75,9.5 ESP32_WROOM32D.14_IO12 | 69.75,2.5 PIN_L.P$13
  Bottom 0.152: v25.5,21.25 25.5,14.75 v26,14.25
IM_RX  (via drill 0.35)
  Top 0.152: v22.75,39.75 22.75,42.25 IM.$P6 | ESP32_WROOM32D.28_IO17 59,26.75 59,27.25 60.75,29 63.5,29 64.75,30.25 PIN_R.P$11
  Bottom 0.152: v22.75,39.75 24.75,39.75 29,35.5 29,34 29.5,33.5 61.75,33.5 PIN_R.P$11
IM_TX  (via drill 0.35)
  Top 0.152: v29.75,34.25 25.75,34.25 22.25,37.75 22.25,38.25 IM.$P7 | ESP32_WROOM32D.27_IO16 60.25,26.75 60.25,27.25 61.5,28.5 65.5,28.5 67.25,30.25 PIN_R.P$12
  Bottom 0.152: v29.75,34.25 63.5,34.25 67.25,30.5 PIN_R.P$12
IO5
  Top 0.152: PIN_R.P$10 61.25,29.5 60,29.5 57.75,27.25 57.75,26.75 ESP32_WROOM32D.29_IO5
IO13
  Top 0.152: ESP32_WROOM32D.16_IO13 64,13.5 64.5,13.5 68.25,9.75 68.25,9.25 74.75,2.75 PIN_L.P$15
IO27
  Top 0.152: ESP32_WROOM32D.12_IO27 60.25,9.5 60.25,7.25 64.75,2.75 PIN_L.P$11
LED1  (via drill 0.35)
  Top 0.152: v45.75,31 44.5,32.25 44.5,38.75 45.25,39.5 45.25,41 R1.1 | v51.5,11.25 52.25,10.5 52.25,9.75 ESP32_WROOM32D.6_IO34 52.25,9.5 52.25,8.75 51.75,8.25 51.75,6 49.75,4 49.75,2.75 PIN_L.P$5
  Bottom 0.152: v45.75,31 45.75,26.5 51.5,20.75 v51.5,11.25
LED2  (via drill 0.35)
  Top 0.152: v50,28.25 48.5,29.75 48.5,30.75 45.5,33.75 45.5,38 R2.1 | v52.5,11.25 53.5,10.25 53.5,9.75 ESP32_WROOM32D.7_IO35 53.5,9.5 53.5,8.75 52.25,7.5 52.25,2.75 PIN_L.P$6
  Bottom 0.152: v50,28.25 50,22.75 52.5,20.25 v52.5,11.25
LED3
  Top 0.152: IM.$P15 20.25,38.25 20.25,37.75 21.5,36.5 23,36.5 26.5,33 31,33 34,30 35.75,30 42.25,36.5 42.25,42 42,42.25 42,43.5 40.25,45.25 40.25,47.25 40.75,47.75 44.5,47.75 45.25,47 R3.1
LED4  (via drill 0.35)
  Top 0.152: v34.75,42.5 38.25,42.5 R4.1
  Bottom 0.152: v34.75,42.5 22.75,42.5 15,34.75 8.25,34.75 7.25,35.75 7.25,37.25 6.5,38 RASPBERRYPI_4B.GPIO17
LED5  (via drill 0.35)
  Top 0.152: v25.5,47.25 28.75,47.25 36,40 38.5,40 R5.1 | v23.5,49.25 5.75,49.25 5,48.5 5,37 6.25,35.75 RASPBERRYPI_4B.GPIO27
  Bottom 0.152: v23.5,49.25 v25.5,47.25
LED6  (via drill 0.35)
  Top 0.152: v28.5,37 38.5,37 R6.1
  Bottom 0.152: v28.5,37 28,37 24.5,40.5 21.25,40.5 14.75,34 7.25,34 6.5,33.25 RASPBERRYPI_4B.GPIO22
MD_LB  (via drill 0.35)
  Top 0.152: PIN_L.P$10 62,2.75 59,5.75 59,9.5 ESP32_WROOM32D.11_IO26 59,9.75 59.25,10 v59.25,11.25 | v61,13 61,22.75 62.75,24.5 68.25,24.5 73.5,29.75 73.5,30.75 79.25,36.5 79.25,37.5 MD_L.RIN
  Bottom 0.152: v59.25,11.25 v61,13
MD_LF  (via drill 0.35)
  Top 0.152: ESP32_WROOM32D.10_IO25 57.75,9.5 57.75,4.5 59.5,2.75 PIN_L.P$9 | v91,31.5 84.25,31.5 80,35.75 80,39.75 79.5,40.25 79.5,42.75 MD_L.FIN
  Bottom 0.152: v91,31.5 92,31.5 97.75,25.75 97.75,13.5 85.75,1.5 60.75,1.5 59.75,2.5 PIN_L.P$9
MD_RB  (via drill 0.35)
  Top 0.152: 77.75,19.25 78.5,19.25 T4.3 | 77.75,19.25 77.25,18.75 C6.1 | 76.75,20.25 77.75,19.25 | ESP32_WROOM32D.25_IO0 62.75,26.75 66.5,26.75 69.25,29.5 71.5,29.5 72.25,30.25 PIN_R.P$14 72.5,30.5 78.25,36.25 v78.25,48 | v78.25,21.75 76.75,20.25 | 76.75,20.25 IO1.D | v79.25,51.5 79.25,54.5 MD_R.RIN
  Bottom 0.152: v78.25,21.75 78.25,24.5 72.5,30.25 PIN_R.P$14 | v79.25,51.5 79.25,49 v78.25,48
MD_RF  (via drill 0.35)
  Top 0.152: ESP32_WROOM32D.26_IO4 61.5,26.75 61.5,27.25 62.25,28 67.25,28 69.75,30.5 PIN_R.P$13 70,30.5 71,31.5 72.75,31.5 73.5,32.25 v73.5,51.5 | v79.25,57.25 79.25,59.5 MD_R.FIN
  Bottom 0.152: v73.5,51.5 v79.25,57.25
N$1
  Top 0.152: ESP_LED1.AN 48.25,41.25 47.25,41.25 R1.2
N$2
  Top 0.152: ESP_LED2.AN 48.25,38.25 47.25,38.25 R2.2
N$3
  Top 0.152: IMCHECK.AN 42.75,47 43.5,47 R3.2
N$4
  Top 0.152: RAS_LED1.AN 41.25,42.75 40.25,42.75 R4.2
N$5
  Top 0.152: RAS_LED2.AN 41.25,39.75 40.25,39.75 R5.2
N$6
  Top 0.152: RAS_LED3.AN 41.25,37 40.25,37 R6.2
N$7  (via drill 0.35)
  Top 0.152: R8.1 24.25,13 24.25,15 R10.2 24.25,15.25 v32.5,15.25 | v47,24.25 48.5,25.75 48.5,26.5 ESP32_WROOM32D.36_IO22
  Bottom 0.152: v32.5,15.25 38,15.25 v47,24.25
N$8  (via drill 0.35)
  Top 0.152: 19.25,13.75 19.25,15 R11.2 | 19.25,13.75 19.25,13 R9.1 | 19.25,13.75 23,13.75 23.25,13.5 23.25,12.25 23.5,12 v27.25,12 | v48.75,22.25 52.25,25.75 52.25,26.5 ESP32_WROOM32D.33_IO21
  Bottom 0.152: v27.25,12 38.5,12 v48.75,22.25
N$9
  Top 2: TM3.1 90.04,83.57 U$7.DRAIN
N$13
  Top 0.152: R15.1 93,28.25 93.75,28.25 PW.AN
N$14
  Top 0.152: R13.2 81,21.5 81,22 T3.1
N$15
  Top 0.152: R14.2 81,17.75 81,18.25 T4.1
N$16
  Top 0.152: R20.2 94.75,17 94,17 U2.9
N$17
  Top 0.152: R21.1 94.75,18 94,18 U2.11
N$18
  Top 0.152: 100KR1.WIPER 49.75,60.5 49.75,68.25 51.75,70.25 U$8.VADJ
N$20
  Top 0.152: SW1.L 96,79 92.75,79 U$10.GATE 92.5,79 97,74.5 R22.1
OUT_MD_L1
  Top 0.5: MD_L.OUT1 83.44,42.8 83.82,43.18
  Top 2: 83.82,43.18 88.9,48.26 88.9,52.07 TM2.1
OUT_MD_L2  (via drill 0.35)
  Top 0.5: MD_L.OUT2 v81.92,35.43
  Top 2: v92.71,48.77 TM2.2
  Bottom 2: v81.92,35.43 92.71,46.23 v92.71,48.77
OUT_MD_R1
  Top 0.5: MD_R.OUT1 83.82,60.33 83.82,60.96
  Top 2: 83.82,60.96 83.82,63.5 88.9,68.58 TM1.1
OUT_MD_R2  (via drill 0.35)
  Top 0.5: MD_R.OUT2 v81.92,52.32
  Top 2: v90.17,63.5 TM1.2
  Bottom 2: v81.92,52.32 90.17,60.58 v90.17,63.5
RP_MISO  (via drill 0.35)
  Top 0.152: ESP32_WROOM32D.31_IO19 55,26.75 55,28.25 57,30.25 PIN_R.P$8 57,30.5 57,36.75 45,48.75 v27,48.75 | v10.25,37 8.75,37 8,36.25 8,28 6.5,26.5 6.5,25.5 RASPBERRYPI_4B.GPIO9
  Bottom 0.152: v10.25,37 23.25,50 25.75,50 v27,48.75
RP_MOSI
  Top 0.152: R7.1 42,31.75 42,30.5 PIN_R.P$2 42,30.25 42.75,29.5 45,29.5 47.25,27.25 47.25,26.75 ESP32_WROOM32D.37_IO23
  Bottom 0.152: RASPBERRYPI_4B.GPIO10 6.5,28 7.5,28 9,29.5 26.75,29.5 27,29.75 33.75,29.75 36,27.5 39,27.5 41.75,30.25 PIN_R.P$2
RP_RX  (via drill 0.35)
  Top 0.152: ESP32_WROOM32D.24_IO2 64,23.75 68.25,23.75 74.75,30.25 PIN_R.P$15 | v24.75,37.75 24.75,47.5 26.75,49.5 55.75,49.5 v72.75,32.5
  Bottom 0.152: v24.75,37.75 18.5,31.5 5.75,31.5 5.5,31.25 5.5,17 5.75,16.75 7,16.75 8,17.75 8.75,17.75 RASPBERRYPI_4B.GPIO1 | v72.75,32.5 74.75,30.5 PIN_R.P$15
RP_SCK  (via drill 0.35)
  Top 0.152: PIN_R.P$9 59.5,30.5 56.5,27.5 56.5,26.75 ESP32_WROOM32D.30_IO18 56.5,26.5 56.5,25.75 58,24.25 v58,15.75 | v30.25,16 30.25,17.25 27.75,19.75 16.75,19.75 15.25,21.25 9,21.25 7.5,22.75 6.5,22.75 RASPBERRYPI_4B.GPIO11
  Bottom 0.152: v30.25,16 26.5,12.25 26.5,11.75 27.75,10.5 52.75,10.5 v58,15.75
RP_SS
  Top 0.152: ESP32_WROOM32D.5_SENSOR_VN 51,9.5 51,5.75 48,2.75 47,2.75 PIN_L.P$4
  Bottom 0.152: RASPBERRYPI_4B.GPIO8 9,22.75 9,21.75 16.25,14.5 16.25,4.25 19.25,1.25 45.5,1.25 46.75,2.5 PIN_L.P$4
RP_TX  (via drill 0.35)
  Top 0.152: PIN_R.P$16 77.25,30.25 70.25,23.25 67.5,23.25 66.75,22.5 64,22.5 ESP32_WROOM32D.23_IO15 63.75,22.25 63,22.25 62.25,21.5 v62.25,13.25
  Bottom 0.152: v62.25,13.25 57.5,8.5 17.5,8.5 16.75,9.25 16.75,16.5 9.5,23.75 8.25,23.75 8,23.5 8,20.5 6.5,19 6.5,18 RASPBERRYPI_4B.GPIO0
RTS  (via drill 0.35)
  Top 0.152: JP2.P$1 72.25,8.25 72.25,13 R16.2 | 80,17.75 80.5,17.25 80.75,17.25 R14.1 | 80,17.75 80,23.25 80.75,24 T3.2 81,24 81.75,24 87.25,18.5 89,18.5 U2.24 | 80,17.75 v78.75,16.5
  Bottom 0.152: v78.75,16.5 75.5,13.25 72.5,13.25 R16.2
RXD  (via drill 0.35)
  Top 0.254: ESP32_WROOM32D.35_TXD0 49.91,27.36 47.02,30.25 47.02,30.48 PIN_R.P$4 | v86.79,17.37 87.55,18.14 88.16,18.14 88.24,18.06 89.08,18.06 U2.25 | v85.95,10.52 85.95,9.14 84.96,8.15 JP2.P$6
  Bottom 0.254: v86.79,17.37 86.79,11.35 v85.95,10.52 85.19,11.28 85.19,11.81 79.55,17.45 62.79,17.45 51.28,28.96 49.38,28.96 47.85,30.48 PIN_R.P$4
SD0
  Top 0.152: ESP32_WROOM32D.21_SD0 64,20 66.5,20 68,21.5 69.5,21.5 74.75,26.75 74.75,27.25 77,29.5 81.75,29.5 82.5,30.25 PIN_R.P$18
SD1  (via drill 0.35)
  Top 0.152: v65.75,21.75 65.25,21.25 64,21.25 ESP32_WROOM32D.22_SD1
  Bottom 0.152: v65.75,21.75 65.75,24.75 71.5,30.5 71.5,32.25 72.75,33.5 77,33.5 80,30.5 PIN_R.P$17
SD2
  Top 0.152: ESP32_WROOM32D.17_SD2 64,14.75 64.5,14.75 69.75,9.5 69.75,8.5 74.75,3.5 76.5,3.5 77.25,2.75 PIN_L.P$16
SD3
  Top 0.152: ESP32_WROOM32D.18_SD3 64,16 64.5,16 71.25,9.25 71.25,7.5 74.75,4 78.75,4 80,2.75 PIN_L.P$17
SENSOR_VP
  Top 0.152: ESP32_WROOM32D.4_SENSOR_VP 49.75,9.5 49.75,5 48.25,3.5 45.25,3.5 44.5,2.75 PIN_L.P$3
SERVO1  (via drill 0.35)
  Top 0.152: ESP32_WROOM32D.8_IO32 54.75,9.5 54.75,2.75 PIN_L.P$7 | v21.75,35.75 23.25,35.75 26.5,32.5 27.75,32.5 28.25,32 28.25,31 26.5,29.25 26.5,28.5 33.75,21.25 33.75,13 42.75,4 v43.25,4
  Bottom 0.152: v21.75,35.75 18,32 5.75,32 5.5,32.25 5.5,58.25 8,60.75 CON2.3 | v43.25,4 53.25,4 54.5,2.75 PIN_L.P$7
SERVO2  (via drill 0.35)
  Top 0.152: PIN_L.P$8 57,2.75 56.5,3.25 56.5,9.5 ESP32_WROOM32D.9_IO33 56.25,9.75 56.25,10.25 v55.25,11.25 | v30,9.25 30,7.25 24.5,1.75 5.5,1.75 1.5,5.75 1.5,59.25 2.5,60.25 2.5,60.75 CON3.3
  Bottom 0.152: v30,9.25 53.25,9.25 v55.25,11.25
TXD  (via drill 0.35)
  Top 0.254: PIN_R.P$5 51.13,28.88 51.13,26.59 ESP32_WROOM32D.34_RXD0 | v87.86,17.45 87.94,17.53 U2.26 | JP2.P$5 v85.88,11.58
  Bottom 0.254: v87.86,17.45 87.71,17.45 87.1,18.06 86.49,18.06 85.88,17.45 | v85.88,11.58 85.88,17.45 | PIN_R.P$5 50.37,30.48 62.94,17.91 85.42,17.91 85.88,17.45

## Text on the board
tPlace: 5V | 3V3 | IO2 | 5V | IO3 | GND | IO4 | IO14 | GND | IO15 | IO17 | IO18 | IO27 | GND | IO22 | IO23 | GND | RP_MOSI | AS_SCL | RXD | TXD | AS_SDA | GND | RP_MISO | RP_SCK | IO5 | IM_RX | IM_TX | MD_RF | MD_RB | RP_RX | 3V3 | IO24 | RP_TX | SD1 | SD0 | CLK | IO10 | GND | IO9 | IO25 | IO8 | IO11 | GND | IO7 | IO1 | IO0 | IO5 | GND | IO6 | IO12 | IO13 | GND | IO19 | IO16 | RTS | GND | CTS | 3V3 | TXD | RXD | DTR | IO26 | IO20 | 3V3 | LED2 | SV1 | SV2 | MD_LF | MD_LB | IO27 | IM_B | IM_R | GND | IO13 | SD2 | SD3 | CMD | +5v | GND | IO21 | EN | S_V | RP_SS | LED1